# EAGLE board Infrarrojo (EAGLE 9.6.2)
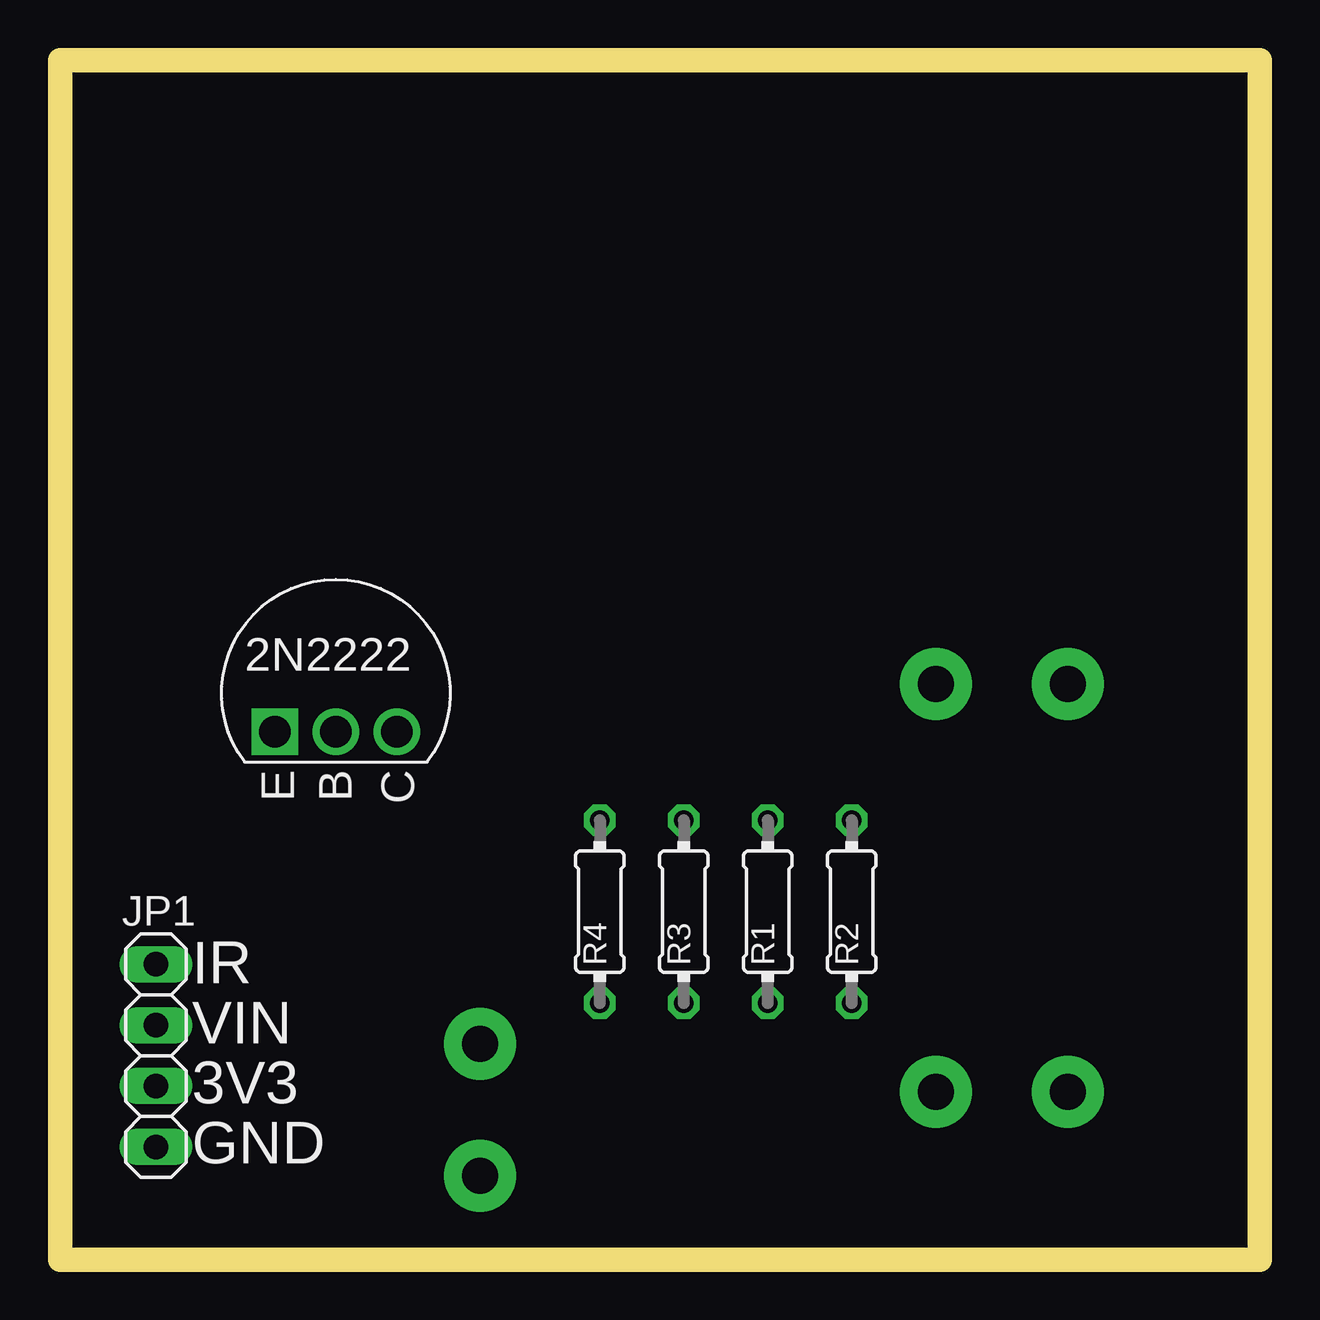
[diagram p0: board, top side]
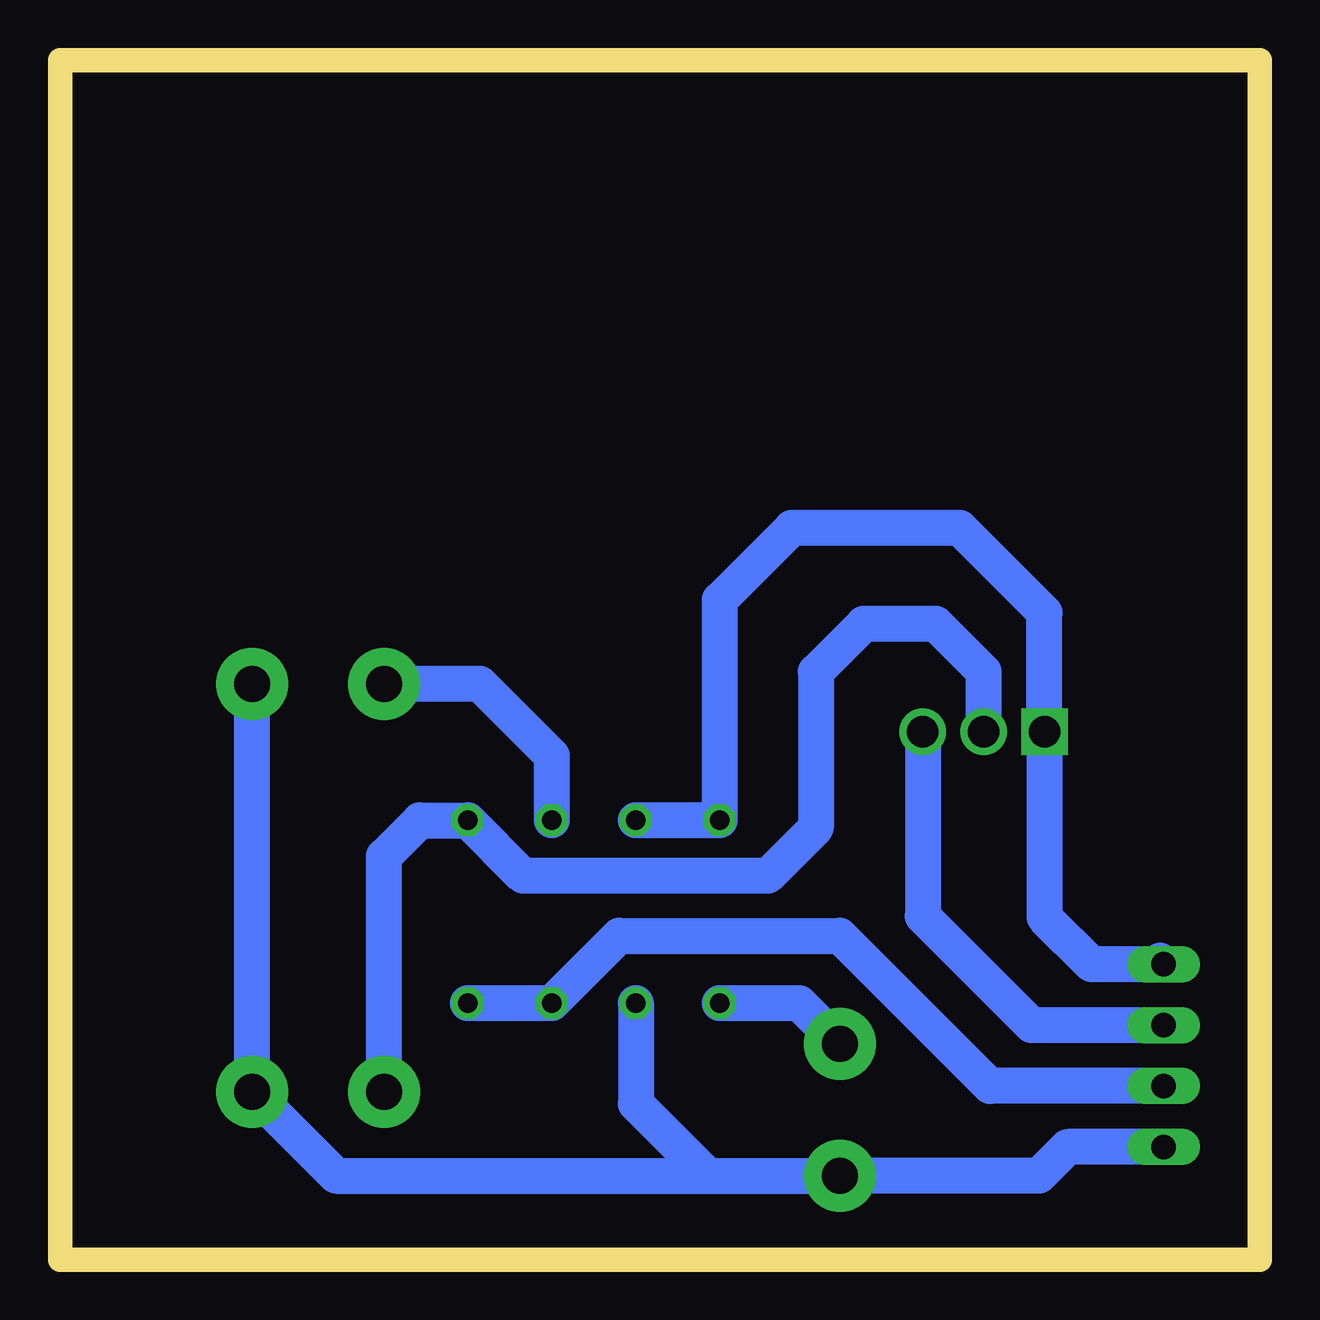
[diagram p1: board, bottom side, seen from below]

Size 50 x 50 mm. Coordinates in mm from the lower left corner, seen from the top.
Outline: 0,0 50,0 50,50 0,50 0,0
Copper layers (1*16): Top 0.035mm / dielectric 1.5mm / Bottom 0.035mm
Design rules "default": minimum track width 6mil, minimum drill 0.35mm, track to track 6mil, track to pad 6mil, pad to pad 6mil, via to via 6mil, smd to smd 6mil, copper to edge 40mil, drill to drill 6mil, minimum pad ring 10mil, minimum via ring 8mil, stop-mask expansion 4mil, vias tented up to drill 0mil, thermal gap 10mil

## Footprints (pad centres in the part's own frame; a part is rotated, then mirrored left to right if it is on the bottom)
1X04 = drill 1.016 long: 1 -3.81,0; 2 -1.27,0; 3 1.27,0; 4 3.81,0
0204/7 = drill 0.813 octagon: 1 -3.81,0; 2 3.81,0
2N2222 = drill 1.3: B 0,0; C 2.54,0 | drill 1.3 square: E -2.54,0

## Placement (x,y rotation side)
JP1  [1X04]  4,8.5 90 top
R1  380  [0204/7]  29.5,14.5 270 top
R2  22K  [0204/7]  33,14.5 270 top
R3  22K  [0204/7]  26,14.5 270 top
R4  220  [0204/7]  22.5,14.5 90 top
U$1  2N2222  [2N2222]  11.5,22 0 top

## Library data of the parts
JP1 = pinhead
R1-R4 = rcl; SPICEPREFIX: R
U$1 = MODULAR

## Nets
3V3: JP1.2 R1.2 R2.2
EMISOR: R1.1
GND: JP1.1 R3.2
LED: R4.1
PULSO-INFRA: JP1.4 R3.1 R4.2 U$1.E
RECEPTOR: R2.1 U$1.B
VIN: JP1.3 U$1.C

## Tracks (layer width: path | path; a pad name or v marks a point on that pad's centre or on a via)
3V3
  Bottom 1.5: JP1.2 11.23,7.23 17.5,13.5 26.69,13.5 R1.2 R2.2
EMISOR  (via drill 1.5 pad 3)
  Bottom 1.5: R1.1 29.5,21 32.5,24 v36.5,24
GND  (via drill 1.5 pad 3)
  Bottom 1.5: R3.2 26,6.5 23,3.5 | 23,3.5 v17.5,3.5 9.19,3.5 8,4.69 JP1.1 | 23,3.5 38.5,3.5 v42,7 v42,24
LED  (via drill 1.5 pad 3)
  Bottom 1.5: R4.1 19.19,10.69 v17.5,9
PULSO-INFRA
  Bottom 1.5: 4.15,12.46 JP1.4 7,12.31 8.96,14.27 U$1.E 8.96,26.96 12.5,30.5 19.5,30.5 22.5,27.5 R4.2 R3.1
RECEPTOR  (via drill 1.5 pad 3)
  Bottom 1.5: U$1.B 11.5,24.5 13.5,26.5 16.5,26.5 18.5,24.5 18.5,18 20.5,16 30.69,16 R2.1 35,18.31 36.5,16.81 v36.5,7
VIN
  Bottom 1.5: JP1.3 9.5,9.77 14.04,14.31 U$1.C

## Text on the board
tPlace: IR | VIN | 3V3 | GND